# Altium PCB DRL.PCBDOC
Units mm, origin at the board's own origin, x right, y up, seen from the top; angles counter-clockwise.
Board outline 152.4 x 101.6 mm, 2 copper layers (Top Layer, Bottom Layer); 86 components, 41 nets, 210 pads, 121 vias.
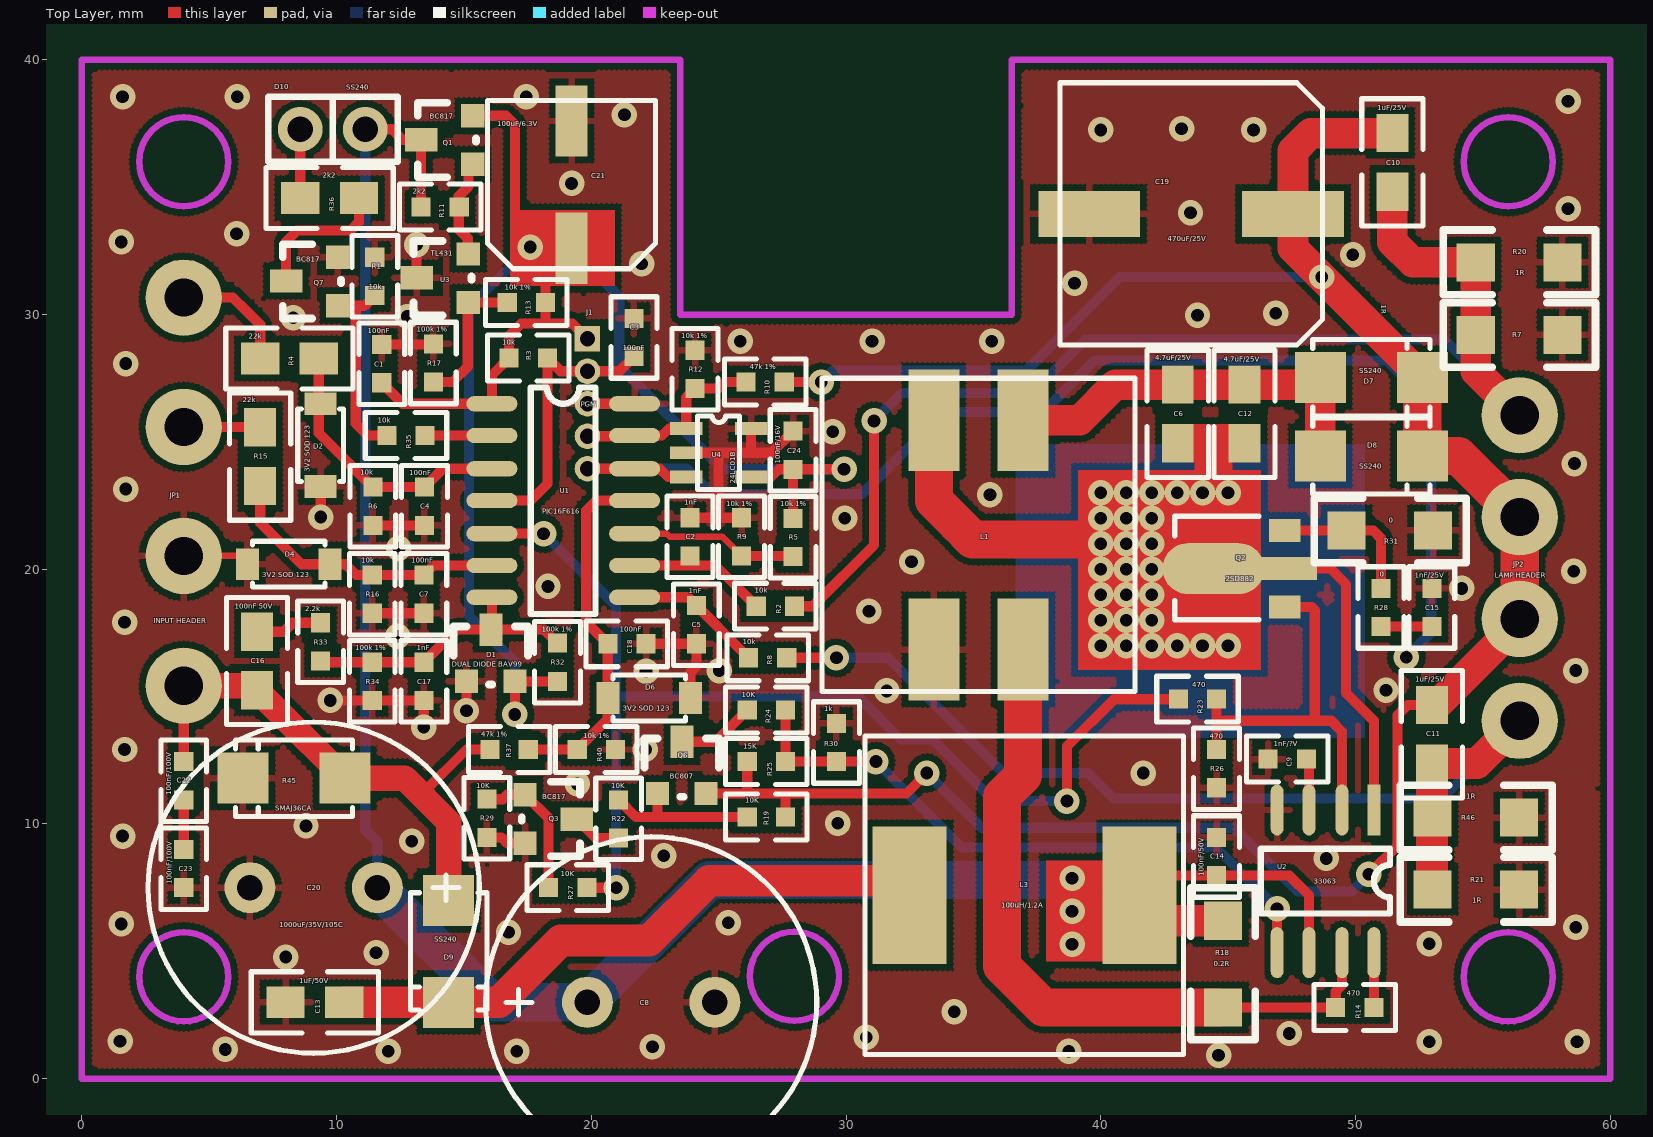
[diagram p0: Top Layer view]
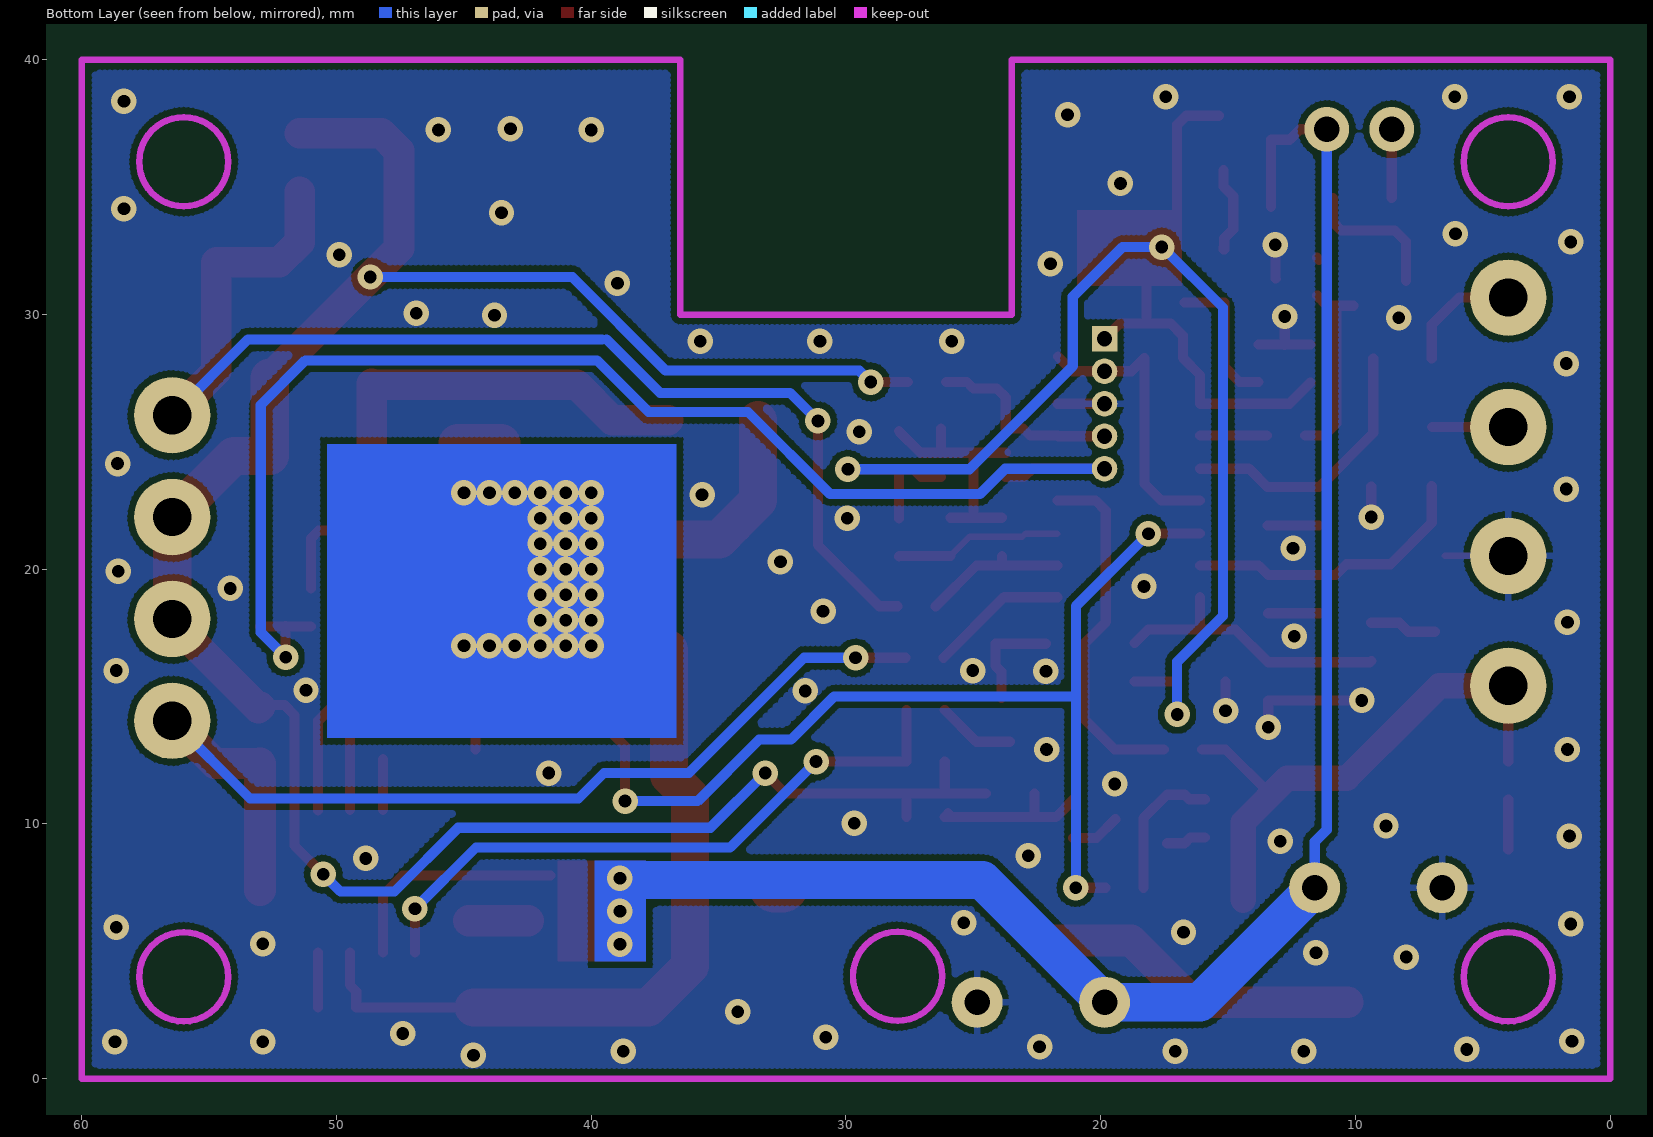
[diagram p1: Bottom Layer view, seen from below]

## Layer stack, top to bottom
Top Layer: signal copper 0.0356
Dielectric: dielectric 0.32, FR-4, Dk 4.8
Bottom Layer: signal copper 0.0356

## Board outline
-17.1,-28.6 135.3,-28.6 135.3,73 -17.1,73

## Design rules (kind name [scope] priority, off if disabled: settings)
Clearance [All] p1: gap=0.25
ComponentClearance [All] p1 off: gap=0.254 collisioncheckmode=0
PlaneClearance [All] p1 off: clearance=0.5
PlaneConnect [All] p1 off: planeconnectstyle=Relief reliefexpansion=0.5 reliefentries=4 reliefconductorwidth=0.4 reliefairgap=0.4
PolygonConnect [All] p1 off: connectstyle=Relief reliefconductorwidth=0.4 reliefentries=4 polygonreliefangle="90 Angle"
RoutingLayers [All] p1: top layer=Horizontal bottom layer=Vertical
RoutingVias [All] p1: holewidth=0.711 width=1.27 viastyle="Through Hole" minholewidth=0.711 minwidth=1.27 maxholewidth=0.711 maxwidth=1.27
ShortCircuit [All] p1 off: allowed=FALSE
SolderMaskExpansion [All] p1: expansion=0.1
TestPointUsage [All] p1: valid=0 allowmultiple=FALSE
Testpoint [All] p1: side=15 testpointundercomponent=TRUE minsize=1.016 maxsize=2.54 preferedsize=1.524 minholesize=0 maxholesize=1.016 preferedholesize=0.813 testpointgrid=0.025 style=1023 order=-539222988
Width [All] p1: maxlimit=5 minlimit=0.25 preferedwidth=0.254 toplayer_prefwidth=0.4 bottomlayer_prefwidth=0.4 minimp=50.000000 maximp=50.000000 favimp=50.000000
13 further rules are at their usual default settings.

## Components (designator, comment, footprint, x,y, rotation, side; value= is the part's Value field where it differs from the comment)
C1 "100nF" 0603 11.775,27.325 r90 top
C2 "1nF" 0603 23.875,20.525 r90 top
C3 "100nF" 0603 21.675,28.35 r90 top
C4 "100nF" 0603 13.45,23.225 r270 top
C5 "1nF" 0603 24.125,18.575 r270 top
C6 "4.7uF/25V" 0805 43.025,24.95 r90 top
C7 "100nF" 0603 13.425,19.775 r270 top
C8 "1000uF/35V/105C" "RA 13mm" 19.85,3 r0 top
C9 "1nF/?V" 0603 48.075,12.55 r180 top
C10 "1uF/25V" 0805 51.45,37.125 r270 top
C11 "1uF/25V" 0805 53,14.675 r270 top
C12 "4.7uF/25V" 0805 45.65,24.95 r90 top
C13 "1uF/50V" 0805 10.3,3 r180 top
C14 "100nF/50V" 0603 44.55,7.975 r90 top
C15 "1nF/25V" 0603 53,17.75 r90 top
C16 "100nF 50V" 0805 6.875,15.25 r90 top
C17 "1nF" 0603 13.425,16.35 r270 top
C18 "100nF" 0603 20.65,17.075 r0 top
C19 "470uF/25V" "CS 10.3" 47.55,33.95 r0 top
C20 "1000uF/35V/105C" "RA 13mm" 11.6,7.5 r180 top
C21 "100uF/6.3V" "CS 6.6" 19.225,32.6 r270 top
C22 "100nF/100V" 0603 4,12.45 r270 top
C23 "100nF/100V" 0603 4,9 r270 top
C24 "100nF/16V" 0603 27.925,23.925 r90 top
D1 "DUAL DIODE BAV99" SOT-23 15.1,15.6 r0 top
D2 "3V2 SOD 123" "SOD 123" 9.375,23.25 r90 top
D4 "3V2 SOD 123" "SOD 123" 6.5,20.2 r0 top
D6 "3V2 SOD 123" "SOD 123" 23.9,14.95 r180 top
D7 "SS240" SMA 52.625,27.525 r180 top
D8 "SS240" SMA 52.625,24.45 r180 top
D9 "SS240" SMA 14.4,3 r90 top
D10 "SS240" SIP2 11.125,37.275 r180 top
J1 "PGM" "SIP5 1.27" 19.85,29.05 r270 top
JP1 "INPUT HEADER" "SIP4 5.1" 4,15.425 r90 top
JP2 "LAMP HEADER" "SIP4 4.0" 56.45,14.05 r90 top
L1 "" "DUAL IND" 33.45,16.85 r180 top
L3 "100uH/1.2A" "IND SINGLE" 32.5,7.2 r90 top
Q1 "BC817" SOT-23 15.35,35.9 r90 top
Q2 "2SD882" SOT-89 47.225,18.525 r90 top
Q3 "BC817" SOT-23 17.4,11.15 r270 top
Q6 "BC807" SOT-23 22.6,11.2 r0 top
Q7 "BC817" SOT-23 10.05,30.35 r90 top
R1 "10k" 0603 11.5,30.75 r90 top
R2 "10k" 0603 26.475,18.55 r0 top
R3 "10k" 0603 16.775,28.3 r0 top
R4 "22k" 0805 7,28.275 r0 top
R5 "10k 1%" 0603 27.925,22 r270 top
R6 "10k" 0603 11.425,23.225 r270 top
R7 "1R" 1206 54.725,29.2 r0 top
R8 "10k" 0603 26.175,16.525 r0 top
R9 "10k 1%" 0603 25.9,20.525 r90 top
R10 "47k 1%" 0603 27.575,27.35 r180 top
R11 "2k2" 0603 13.318,34.225 r0 top
R12 "10k 1%" 0603 24.075,27.1 r90 top
R13 "10k 1%" 0603 16.7,30.475 r0 top
R14 "470" 0603 50.725,2.8 r180 top
R15 "22k" 0805 7,25.575 r270 top
R16 "10k" 0603 11.4,19.775 r270 top
R17 "100k 1%" 0603 13.8,28.85 r270 top
R18 "0.2R" 1206 44.8,2.8 r90 top
R19 "10K" 0603 26.125,10.275 r0 top
R20 "1R" 1206 54.725,32.05 r0 top
R21 "1R" 1206 53.025,7.425 r0 top
R22 "10K" 0603 21.075,9.45 r90 top
R23 "470" 0603 44.55,14.9 r180 top
R24 "10K" 0603 27.625,14.475 r180 top
R25 "15K" 0603 26.125,12.45 r0 top
R26 "470" 0603 44.55,12.925 r270 top
R27 "10K" 0603 19.825,7.5 r180 top
R28 "0" 0603 51,19.25 r270 top
R29 "10K" 0603 15.9,9.475 r90 top
R30 "1k" 0603 29.625,12.45 r90 top
R31 "0" 1206 49.65,21.525 r0 top
R32 "100k 1%" 0603 18.675,15.6 r90 top
R33 "2.2k" 0603 9.375,17.9 r270 top
R34 "100k 1%" 0603 11.4,16.35 r270 top
R35 "10k" 0603 13.475,25.25 r180 top
R36 "2k2" 0805 8.575,34.575 r0 top
R37 "47k 1%" 0603 16.025,12.925 r0 top
R40 "10k 1%" 0603 19.45,12.925 r0 top
R45 "SMAJ36CA" SMA 6.325,11.8 r0 top
R46 "1R" 1206 53.025,10.25 r0 top
U1 "PIC16F616" SO-14 16.1,26.5 r0 top
U2 "33063" SO-8 50.725,10.55 r270 top
U3 "TL431" SOT-23 15.175,30.475 r90 top
U4 "24LC01B" "SOT23 - 5" 23.725,25.525 r270 top (schematic designator U?)

## Footprints (in the part's own frame and the unit in brackets; to place one, negate y for a bottom-side part, rotate by r counter-clockwise, add the part's x,y. Pads: shape width x height; smd on the part's side, far side on the other; paste and mask are expansions set on the pad)
0603 [mm]
  rect 0.75x0.75 smd: 1(0,0) 2(1.5,0)
  silkscreen extent -0.85,-0.9 2.35,0.9
0805 [mm]
  rect 1.5x1.25 smd: 1(0,0) 2(2.3,0)
  silkscreen extent -1.35,-1.2 3.65,1.2
1206 [mm]
  rect 1.5x1.5 smd: 1(0,0) 2(3.4,0)
  silkscreen extent -1.27,-1.27 4.7,1.27
"CS 6.6" [mm] "SMD Capacitor base 6.6/6.6mm"
  rect 2.8x1.25 smd: 1(0,0) 2(-5,0)
  silkscreen extent -5.8,-3.3 0.8,3.3
"CS 10.3" [mm]
  rect 4x1.8 smd: 1(0,0) 2(-8,0)
  silkscreen extent -9.15,-5.15 1.15,5.15
"DUAL IND" [mm] "Counpled Inductor MSD1278T"
  rect 2x4 smd: 1(0,0) 2(-3.5,0) 3(-3.5,-9) 4(0,-9)
  silkscreen extent -7.9,-10.65 4.4,1.65
"IND SINGLE" [mm]
  rect 5.4x2.9 smd: 1(0,0) 2(0,-9.025)
  silkscreen extent -6.25,-10.75 6.25,1.75
"RA 13mm" [mm]
  round 2 hole 1: 1(0,0) 2(5,0)
  silkscreen extent -4,-6.5 9,6.5
SIP2 [mm]
  round 1.75 hole 1: 1(0,0) 2(2.55,0)
  silkscreen extent -1.27,-1.27 3.81,1.27
"SIP4 4.0" [mm]
  round 3 hole 1.5: 1(0,0) 2(4,0) 3(8,0) 4(12,0)
"SIP4 5.1" [mm]
  round 3 hole 1.5: 1(0,0) 2(5.1,0) 3(10.16,0) 4(15.24,0)
"SIP5 1.27" [mm]
  rect 1x1 hole 0.6: 1(0,0)
  round 1 hole 0.6: 2(1.275,0) 3(2.55,0) 4(3.825,0) 5(5.1,0)
SMA [mm]
  rect 2x2 smd: A(4,0) K(0,0)
  silkscreen extent -0.3,-1.5 4.3,1.5
SO-8 [mm]
  rect 2x0.5 smd: 1(0,0)
  oval 2x0.5 smd: 2(0,-1.25) 3(0,-2.55) 4(0,-3.8) 5(5.6,-3.8) 6(5.6,-2.55) 7(5.6,-1.25) 8(5.6,0)
  silkscreen extent 1.52,-4.44 4.06,0.64
SO-14 [mm]
  oval 2x0.6 smd: 1(0,0) 2(0,-1.25) 3(0,-2.55) 4(0,-3.8) 5(0,-5.1) 6(0,-6.35) 7(0,-7.6) 8(5.6,-7.6) 9(5.6,-6.35) 10(5.6,-5.1) 11(5.6,-3.8) 12(5.6,-2.55) 13(5.6,-1.25) 14(5.6,0)
  silkscreen extent 1.52,-8.25 4.06,0.64
"SOD 123" [mm]
  rect 0.9x1.25 smd: 1(0,0) 2(3.25,0)
  silkscreen extent 0.2,-0.9 3.05,0.9
"SOT23 - 5" [mm]
  rect 0.508x1.27 smd: 1(0,0) 2(0.95,0) 3(1.9,0) 4(1.9,2.55) 5(0,2.55)
  silkscreen extent -0.5,0.45 2.4,2.1
SOT-23 [mil]
  rect 36x36 smd: 1(0,0) 3(75,0)
  rect 36x50 smd: 2(38,80)
  silkscreen extent -20,-5 95,85
SOT-89 [mm]
  rect 0.9x1.25 smd: 1(0,0) 3(3,0)
  oval 2x4 smd: 2(1.5,2.8)
  rect 0.9x2.55 smd: 2(1.5,0)
  silkscreen extent -0.51,1.02 3.56,4.32

## Part data
C1 C2 C3 C4 C5 C6 C7 C9 C10 C11 C12 C13 C14 C15 C16 C17 C18 C22 C23 C24: library part CAP, "Capacitor"
C8 C19 C20 C21: library part CAPACITOR, "Capacitor"
D1 D2 D4 D6: library part ZENER3, "Zener Diode"
D7 D8 D9 D10: library part DIODE, "Diode"
J1: library part CON5, "Connector"
JP1 JP2: library part "4 HEADER", "4 Pin Header"
L1: library part "INDICTOR SEPIC"
L3: library part INDUCTOR
Q1 Q2 Q3 Q7: library part NPN1, "NPN Transistor"
Q6: library part PNP1, "PNP Transistor"
R1 R2 R3 R4 R5 R6 R7 R8 R9 R10 R11 R12 R13 R14 R15 R16 R17 R18 R19 R20 R21 R22 R23 R24 R25 R26 R27 R28 R29 R30 R31 R32 R33 R34 R35 R36 R37 R40 R46: library part RES1
R45: library part VARISTOR
U1: "Microchip Microcontroller"
U2: library part 34063, "DC/DC converter"
U4: library part "MEMORY I2C SOT23"

## Via types
v1: diameter 1, hole 0.5, Top Layer to Bottom Layer, 121 vias

## Nets (pads, with @x,y where several pads share a name; then routed paths per layer and width w, separated by ;. In a path a pad name is that pad's centre, name@x,y a point inside that pad or via, vN(x,y) a via of type N, cw(c..) or ccw(c..) an arc to the next point about the centre after c; other vN are vias at no path point)
2.5V: C1.1 C21.1 C24.1 D1.3 J1.1 Q1.3 R3.1 R5.1 R13.2 R32.1 U1.1 U4.4 | length 65.8
  Top Layer w0.4: C1.1 12.6,26.5 U1.1 16.1,27.625 R3.1 16.775,29.175 17.25,29.65 19.25,29.65 J1.1 ; Q1.3 16.645,37.805 17,37.45 17,33.875 ; v1@17.005,14.305 D1.3 R32.1 ; 18.1,32.925 C21.1@19.225,32.925 ; 18.125,29.65 18.2,29.725 18.2,31.5 ; U4.4 27.05,23.625 27.35,23.925 v1(29.925,23.925) ; R5.1 C24.1@27.925,23.9
  Bottom Layer w0.4: v1(17,14.3) 17,16.375 15.2,18.175 15.2,30.275 v1@17.575,32.65 ; v1(17.6,32.65) 19.15,32.65 21.1,30.7 21.1,27.975 25.15,23.925 v1(29.925,23.925)
AAC: C7.1 D4.2 R15.2 R16.1 U1.6 | length 11.6
  Top Layer w0.4: R15.2 7,21.825 8.625,20.2 D4.2 10.35,20.2 10.775,19.775 R16.1 C7.1 13.8,20.15 U1.6
"AAC INPUT": JP1.3 R15.1 | length 3
  Top Layer w0.4: JP1.3 R15.1@6.99,25.585
DRVC: R14.1 U2.8 | length 2.2
  Top Layer w0.4: R14.1 U2.8
FB: R24.1 R25.2 R30.1 U2.5 | length 25.4
  Top Layer w0.4: R24.1 R25.2 v1(31.175,12.45) ; U2.5 v1(46.925,6.675)
  Bottom Layer w0.4: v1(31.175,12.45) 34.55,9.075 44.525,9.075 v1(46.925,6.675)
FB1: C2.1 R2.1 U1.9 | length 5.8
  Top Layer w0.4: U1.9 24.875,20.15 R2.1 ; C2.1@23.875,20.15 C2.1
FB2: C5.1 R8.1 U1.8 | length 5.5
  Top Layer w0.4: U1.8 23.8,18.9 R8.1
GND: C1.2 C2.2 C3.2 C4.2 C5.2 C7.2 C8.2 C9.2 C13.2 C14.2 C15.2 C17.2 C18.2 C19.2 C20.2 C21.2 C23.2 C24.2 D1.1 D2.1 D4.1 D6.1 J1.3 JP1.2 L1.1 Q3.3 Q7.3 R1.2 R6.2 R7.2 R9.2 R12.2 R16.2 R17.1 R20.2 R21.2 R26.2 R29.1 R30.2 R31.2 R34.2 R40.2 R45.K R46.2 U1.14 U2.4 U3.2 U4.2 U4.5 | length 36
  Top Layer w0.254: JP1.2@3.975,20.525 D4.1@6.5,20.525 ; U3.2@13.05,31.4 U3.2@13.075,31.375
  Top Layer w0.4: v1(9.375,22.05) D2.1 ; v1(9.75,14.85) R34.2 C17.2 v1(13.425,13.8) ; R16.2 C7.2 ; R6.2 C4.2 ; R1.2@11.425,32.15 R1.2@11.512,32.237 ; C1.2 R17.1@13.8,28.825 ; 12.775,28.8 v1(12.775,29.925) ; U3.2@13.143,31.415 v1(13.143,32.74) ; v1(15.1,14.45) D1.1 ; R29.1 16.475,9.475 16.705,9.245 Q3.3 ; J1.3 U1.14 ; C18.2 C5.2 24.125,16.2 23.9,15.975 D6.1 ; U4.2 27.075,24.575 C24.2 ; C2.2 R9.2 ; 25,22.025 25,24.575 ; 26.275,24.575 U4.5
  other v1: 44.625,0.925 12.025,1.075 17.075,1.075 38.75,1.075 5.625,1.15 22.4,1.25 52.9,1.45 58.7,1.45 1.5,1.475 30.8,1.625 47.4,1.775 34.25,2.625 8,4.775 11.55,4.95 52.9,5.3 16.75,5.75 58.65,5.95 1.55,6.075 25.375,6.125 48.85,8.65 22.85,8.75 12.95,9.325 1.6,9.525 8.8,9.925 29.675,10.025 19.45,11.575 41.675,12 1.675,12.925 22.125,12.925 31.6,15.225 51.2,15.25 22.15,16 25.025,16.025 58.65,16.025 12.4,17.375 1.675,17.925 30.9,18.35 54.175,19.25 18.3,19.325 58.575,19.925 32.575,20.3 12.45,20.825 29.95,22 35.65,22.925 1.725,23.15 58.6,24.15 29.475,25.4 1.725,28.075 25.85,28.95 31.025,28.95 35.725,28.95 8.3,29.875 43.8,29.975 46.875,30.05 38.975,31.225 21.975,32 49.9,32.35 1.55,32.85 6.075,33.175 43.525,34 58.35,34.15 19.225,35.15 40,37.25 46,37.25 43.175,37.3 21.3,37.85 58.35,38.375 1.6,38.55 6.1,38.55 17.45,38.55
IPK: L1.2 R14.2 R18.1 U2.7 | length 28.8
  Top Layer w0.4: R18.1@44.625,2.8 R14.2 49.225,3.425 49.475,3.675 U2.7
  Top Layer w1.5: L1.2 36.95,11.9 36.125,11.075 36.125,4.425 37.75,2.8 R18.1@44.625,2.8
LED: D10.2 R36.1 | length 2.7
  Top Layer w0.4: R36.1 D10.2
MCLR: C3.1 J1.2 R3.2 U1.4 | length 11.2
  Top Layer w0.4: U1.4 17.625,22.7 18.275,23.35 R3.2 18.8,27.775 21.1,27.775 C3.1
NetC6_2: C6.2 C12.2 D7.A D8.A L1.3 | length 15.9
  Top Layer w0.4: L1.3 L1.3@36.975,25.85 ; D7.A@48.25,27.15 48.35,27.25 48.5,27.4 D7.A D7.A@48.625,27.275 ; D8.A D8.A@48.625,24.5
  Top Layer w1.2: L1.3@36.975,25.85 39.175,25.85 40.575,27.25 48.6,27.25 D7.A@48.625,27.225 ; D8.A@48.625,24.5 D7.A@48.625,27.275
NetC9_1: C9.1 U2.3 | length 2
  Top Layer w0.4: U2.3 C9.1@48.175,12.55
NetC13_1: C13.1 D9.K L3.1 | length 25.2
  Top Layer w1.25: C13.1 16.375,3 18.8,5.425 22.275,5.425 24.625,7.775 L3.1@32.75,7.775
  Top Layer w1.5: L3.1@32.5,7.775 L3.1@33,7.775
  Top Layer w2: L3.1@32.5,7.525 L3.1@32.8,7.525
NetC16_2: C16.2 R33.1 | length 2.6
  Top Layer w0.4: C16.2 7.925,17.55 8.275,17.9 R33.1
NetC22_2: C22.2 C23.1 | length 2
  Top Layer w0.4: C23.1 C22.2
NetQ1_1: Q1.1 R11.2 U3.3 | length 3.5
  Top Layer w0.4: U3.3@15.15,32.55 15.15,33 14.8,33.35 14.8,34.65 15.175,35.025 Q1.1@15.175,35.675 ; U3.3@15.175,32.55 U3.3@15.175,32.65
NetQ2_3: Q2.3 R28.1 R31.1 | length 5.9
  Top Layer w0.4: Q2.3 50.7,21.525 51,21.225 R28.1
NetQ3_1: Q3.1 R27.2 R29.2 | length 5.6
  Top Layer w0.4: R29.2 16.525,10.975 16.7,11.15 Q3.1 18.325,10.225 R27.2
NetQ3_2: Q3.2 R22.1 | length 1.9
  Top Layer w0.4: Q3.2 20.167,9.45 R22.1
NetQ6_2: Q6.2 R24.2 | length 3.1
  Top Layer w0.4: Q6.2 24.882,13.232 R24.2
NetQ7_1: Q7.1 R1.1 R35.2 | length 7.7
  Top Layer w0.4: Q7.1@10.075,30.35 10.775,30.35 ; R1.1@11.4,30.65 R1.1@11.425,30.65 ; R1.1 11.1,30.35 10.75,30.35 10.75,25.725 11.225,25.25 R35.2
NetQ7_2: Q7.2 R36.2 | length 5.7
  Top Layer w0.4: Q7.2 8.018,32.868 8.45,33.3 10.55,33.3 10.875,33.625 R36.2
NetR13_1: R13.1 R17.2 U3.1 | length 5.7
  Top Layer w0.4: R17.2 14.55,27.35 15.15,27.95 15.15,30.475 R13.1
OUT1: C10.2 JP2.4 R2.2 R7.1 R20.1 | length 49
  Top Layer w0.4: R2.2 28.7,18.55 31.1,20.95 v1(31.1,25.825)
  Top Layer w1.2: C10.2 51.45,32.85 52.25,32.05 R20.1 54.725,27.775 JP2.4
  Bottom Layer w0.4: v1(31.1,25.825) 32.2,26.925 37.3,26.925 39.4,29.025 ; 39.575,29.025 53.475,29.025 JP2.4
OUT2: C11.2 JP2.1 R8.2 R21.1 R46.1 | length 41.4
  Top Layer w0.4: R8.2 v1(29.625,16.525)
  Top Layer w1.2: C11.2 54.775,12.375 JP2.1
  Top Layer w1.25: R21.1@53,7.4 C11.2
  Bottom Layer w0.4: v1(29.625,16.525) 31.65,16.525 36.175,12 39.5,12 40.5,11 53.4,11 JP2.1
PEAKS: C17.1 D1.2 R32.2 R33.2 R34.1 U1.7 | length 11.4
  Top Layer w0.4: R33.2 9.425,16.35 R34.1 C17.1 14.707,17.632 18.143,17.632 R32.2 ; D1.2 16.1,17.667 U1.7
PL: C4.1 D2.2 R4.2 R6.1 U1.3 | length 10.9
  Top Layer w0.4: R4.2 9.3,26.575 9.3,25.35 R6.1 C4.1 14.175,23.95 U1.3
"PL INPUT": JP1.4 R4.1 | length 4.8
  Top Layer w0.4: JP1.4 5.935,30.665 6.475,30.125 7,29.6 R4.1
PNPBASE: Q6.1 R19.1 R22.2 | length 6.3
  Top Layer w0.4: R22.2 21.75,10.275 R19.1 ; 22.6,10.275 Q6.1 ; R19.1@25.987,10.413 R19.1@26,10.425
POWER: C16.1 C22.1 D9.A JP1.1 R37.1 R45.A | length 22.2
  Top Layer w0.4: C22.1 JP1.1 ; 13.25,11.175 13.35,11.175 15.1,12.925 R37.1
  Top Layer w1: JP1.1 6.7,15.425 7.68,14.445 R45.A 12.675,11.8 14.4,10.075 D9.A
PWM: R23.2 R27.1 U1.5 | length 45
  Top Layer w0.4: U1.5 v1(18.125,21.4) ; R27.1 v1(20.975,7.5) ; v1(38.675,10.9) 38.675,13.05 40.525,14.9 R23.2
  Bottom Layer w0.4: v1@18.1,21.4 v1@18.1,21.425 ; v1(18.125,21.4) 20.975,18.55 v1(20.975,7.5) ; 20.975,15 30.475,15 32.156,13.319 33.406,13.319 35.825,10.9 v1(38.675,10.9)
REF: R5.2 R9.1 U1.10 | length 6.6
  Top Layer w0.25: U1.10 22.95,21.4 23.075,21.275 25.15,21.275 R9.1
  Top Layer w0.4: R9.1 27.9,20.525 R5.2
SCL/VOLTFB: J1.4 R10.2 R12.1 U1.13 U4.1 | length 7.8
  Top Layer w0.4: J1.4 21.675,25.225 U1.13 22.775,25.25 23.05,25.525 U4.1 23.725,26.75 R12.1 25,27.1 25.25,27.35 R10.2
SDA/IPKSENSE: C15.1 J1.5 R28.2 U1.12 U4.3 | length 54
  Top Layer w0.4: J1.5 22.686,23.95 23.011,23.625 U4.3 ; R28.2 C15.1 ; v1(52,16.55) 52,17.775
  Bottom Layer w0.4: J1.5 23.75,23.95 24.75,22.95 30.625,22.95 33.85,26.175 37.75,26.175 39.775,28.2 51.225,28.2 52.975,26.45 52.975,17.525 v1(52,16.55)
SMPSIN: C8.1 C14.1 C20.1 D10.1 L3.2 Q1.2 R11.1 R18.2 U2.6 | length 77.7
  Top Layer w0.4: D10.1 12.175,37.275 12.585,36.865 Q1.2 R11.1 ; L3.2@41.6,7.975 47.4,7.975 48.175,7.2 U2.6
  Top Layer w1.25: L3.2@42.475,6.2 R18.2
  Bottom Layer w0.4: D10.1 11.125,9.775 11.6,9.3 C20.1
  Bottom Layer w1.5: C20.1 16.1,3 C8.1 24.65,7.8 v1@39,7.8
  other v1: 38.875,5.275 38.875,6.575 38.875,7.875
SMPSOUT: C10.1 C11.1 C19.1 D7.K D8.K JP2.2 JP2.3 Q6.3 R10.1 R19.2 R25.1 | length 93.4
  Top Layer w0.4: Q6.3 32.375,11.2 v1@33.2,12.025 ; 26.125,11.2 R25.1 ; R10.1 v1(29.025,27.35) ; R19.2 27.625,11.175 ; v1(50.525,8.025) 51.65,9.15 51.65,14.275 52.05,14.675 C11.1 ; C11.1@53.012,14.544 C11.1@53.075,14.55
  Top Layer w1.2: C10.1 48.25,37.125 47.55,36.425 47.55,32.6 D7.K D7.K@52.425,27.525 ; C11.1@53,14.6 C11.1@53.125,14.6 ; C11.1@53.075,14.55 JP2.2@56,17.475
  Top Layer w1.5: D7.K D8.K 54.05,24.45 JP2.3 JP2.2
  Bottom Layer w0.4: v1(29.025,27.35) 29.475,27.8 37.075,27.8 40.75,31.475 v1(48.675,31.475) ; v1(33.175,12) 35.325,9.85 45.225,9.85 47.725,7.35 49.85,7.35 v1(50.525,8.025)
"SW C": C6.1 C12.1 L1.4 Q2.2 U2.1 | length 33.2
  Top Layer w0.4: Q2.2@47.225,20.025 49.025,20.025 49.625,19.425 49.625,15.15 50.725,14.05 U2.1@50.725,10.525
  Top Layer w1.5: L1.4 33.45,22.7 34.378,21.772 34.975,21.175 v1@40.075,21.175 ; v1@40.175,20 44.4,20 44.425,20.025 44.425,24.85 ; C6.1@43.525,24.95 C12.1@45.25,24.95
  other v1: 40,17 41,17 42,17 43,17 44,17 45,17 40,18 41,18 42,18 40,19 41,19 42,19 40,20 41,20 42,20 40,21 41,21 42,21 40,22 41,22 42,22 40,23 41,23 42,23 43,23 44,23 45,23
"SW E": Q2.1 R23.1 R26.1 U2.2 | length 15.7
  Top Layer w0.4: R26.1 R23.1 ; 44.55,14.05 49.05,14.05 49.475,13.625 U2.2 ; Q2.1 48.275,18.525 48.4,18.4 48.4,14.05
TEST: R35.1 U1.2 | length 2.6
  Top Layer w0.4: R35.1 U1.2
THRESHOLD: C18.1 D6.2 R37.2 R40.1 U1.11 | length 14.2
  Top Layer w0.4: R37.2 R40.1 20.65,14.125 D6.2 C18.1 19.8,17.925 19.8,22.3 20.2,22.7 U1.11

## Polygon pours and split planes (outlines as drawn)
GND on Top Layer (hatched 90Degree grid 0.2 track 0.25, remove dead copper): 60.017,-0.019 60.017,39.981 0.017,39.981 0.017,-0.019
GND on Bottom Layer (hatched 90Degree grid 0.2 track 0.3, remove dead copper): 60.021,-0.031 60.021,39.969 0.021,39.969 0.021,-0.031

## Keep-outs
Keep-Out Layer:
  circle w0.254: c27.975,4.025 r1.75
  circle w0.254: c4,4 r1.75
  circle w0.254: c4,36 r1.75
  circle w0.254: c56,36 r1.75
  circle w0.254: c56,4 r1.75
  lines w0.254: 0,0 60,0 60,40 36.5,40 36.5,30 23.5,30 23.5,40 0,40 0,0

## Other copper
Top Layer:
  rectangle net SMPSIN: 37.85,4.6 41.325,8.575
  rectangle net "SW C": 39.1,16.05 46.3,23.9
  rectangle net 2.5V: 16.8,31.125 20.925,34.1
Bottom Layer:
  rectangle net "SW C": 36.65,13.375 50.375,24.925
  rectangle net SMPSIN: 37.85,4.6 39.875,8.575